# EAGLE board AllOfTheAbove7x_9nov (EAGLE 7.7.0)

Size 180.66 x 105.08 mm. Coordinates in mm from the lower left corner, seen from the top.
Copper layers (1*16): Top 0.035mm / dielectric 1.5mm / Bottom 0.035mm
Design rules "default": minimum track width 6mil, minimum drill 0.35mm, track to track 6mil, track to pad 6mil, pad to pad 6mil, via to via 6mil, smd to smd 6mil, copper to edge 40mil, drill to drill 6mil, minimum pad ring 10mil, minimum via ring 8mil, stop-mask expansion 4mil, vias tented up to drill 0mil, thermal gap 10mil
Net classes: 1 power: width 0.381 mm

## Footprints (pad centres in the part's own frame; a part is rotated, then mirrored left to right if it is on the bottom)
FENIXINTERNALCONNECTIONPAD = smd 0.635 x 1.27 bottom: P$1 0,0
CASE-A_3216 = smd 1.27 x 1.27: + -1.27,0; - 1.27,0
C0603 = smd 0.889 x 0.889: 1 -0.762,0; 2 0.762,0
SOT-323 = smd 0.7 x 0.9: ANODE -0.65,-0.95; CATHODE 0,0.95; NC 0.65,-0.95
DO35-10 = drill 0.813 long: A 5.08,0; C -5.08,0
SO08 = smd 0.6 x 2.2: 1 -1.905,-2.6; 2 -0.635,-2.6; 3 0.635,-2.6; 4 1.905,-2.6; 5 1.905,2.6; 6 0.635,2.6; 7 -0.635,2.6; 8 -1.905,2.6
1X03 = drill 1.016 long: 1 -2.54,0; 2 0,0; 3 2.54,0
ALPS_POT_SQUAREHOLES = drill 1: P$1 -2.5,-7.5; P$2 0,-7.5; P$3 2.58,-7.5 | smd 2.5 x 2: P$4 -4.75,0; P$5 4.75,0 | smd 2.5 x 2 bottom: P$6 -4.75,0; P$7 4.75,0
R0603 = smd 0.889 x 0.889: 1 -0.762,0; 2 0.762,0
153CLV-0505 = smd 3 x 1.6: + 2.2,0; - -2.2,0
SOT23 = smd 1 x 1.4: 1 -0.95,-1.1; 2 0.95,-1.1; 3 0,1.1
SOT23-BEC = smd 1 x 1.4: B -0.95,-1.1; C 0,1.1; E 0.95,-1.1
DO-214AC = smd 2.5 x 1.7: 1 -2,0; 2 2,0
TO92-EBC = drill 0.813 long: B 0,-1.27; C 2.54,-1.27; E -2.54,-1.27
TO252 = smd 1 x 1.6: 1 -2.28,-4.8; 2 2.28,-4.8 | smd 5.4 x 6.2: 3 0,2.5
TSSOP14 = smd 0.305 x 0.991: 1 -1.95,-2.918; 2 -1.3,-2.918; 3 -0.65,-2.918; 4 0,-2.918; 5 0.65,-2.918; 6 1.3,-2.918; 7 1.95,-2.918; 8 1.95,2.918; 9 1.3,2.918; 10 0.65,2.918; 11 0,2.918; 12 -0.65,2.918; 13 -1.3,2.918; 14 -1.95,2.918
SO16 = smd 0.6 x 2.2: 1 -4.445,-2.6; 2 -3.175,-2.6; 3 -1.905,-2.6; 4 -0.635,-2.6; 5 0.635,-2.6; 6 1.905,-2.6; 7 3.175,-2.6; 8 4.445,-2.6; 9 4.445,2.6; 10 3.175,2.6; 11 1.905,2.6; 12 0.635,2.6; 13 -0.635,2.6; 14 -1.905,2.6; 15 -3.175,2.6; 16 -4.445,2.6
3.5MM-JACK-SWITCH-13MM-NOHOLES = smd 1.95 x 3.85 bottom: RING_B@1 -3.7,0; SWITCH_B@1 3.7,0 | smd 1.95 x 3.85: RING_T@3 -3.7,0; SWITCH_T@3 3.7,0 | smd 3.85 x 1.95 bottom: SECOND_B@1 0,-3.5; TIP_B@1 0,4.5 | smd 3.85 x 1.95: SECOND_T@3 0,-3.5; TIP_T@3 0,4.5
POWER_16_SHROUDED = drill 1.016 pad 1.88 square: 1 -8.89,-1.27 | drill 1.016 pad 1.88: 2 -8.89,1.27; 3 -6.35,-1.27; 4 -6.35,1.27; 5 -3.81,-1.27; 6 -3.81,1.27; 7 -1.27,-1.27; 8 -1.27,1.27; 9 1.27,-1.27; 10 1.27,1.27; 11 3.81,-1.27; 12 3.81,1.27; 13 6.35,-1.27; 14 6.35,1.27; 15 8.89,-1.27; 16 8.89,1.27
POWERTESTPAD = drill 1 pad 2: P$1 0,0 | smd 2 x 1.5: P$2 0,-0.75 | smd 2 x 1.5 bottom: P$3 0,-0.75
BYPASSBOARD = drill 0.8 long: 12V 31.75,15.24; GND 34.29,5.08; GND2 138.43,15.24; GND3 140.97,5.08 | drill 0.8 square: P$1 31.75,5.08 | drill 0.8: P$2 31.75,10.16; P$3 31.75,7.62; P$4 31.75,12.7; P$5 34.29,15.24; P$6 34.29,10.16; P$7 34.29,12.7; P$8 34.29,7.62; P$9 104.14,5.08; P$10 104.14,10.16; P$11 104.14,7.62; P$12 104.14,12.7; P$13 138.43,5.08; P$14 138.43,10.16; P$15 138.43,7.62; P$16 138.43,12.7; P$17 140.97,15.24; P$18 140.97,10.16; P$19 140.97,12.7; P$20 140.97,7.62
GROUNDLOOP = drill 0.8 offset: P$1 1.27,0; P$2 -1.27,0
2X3-SHROUDED = drill 1.016 pad 1.88 octagon: 1 -1.27,2.54; 2 1.27,2.54; 3 -1.27,0; 4 1.27,0; 5 -1.27,-2.54; 6 1.27,-2.54
TC33X = smd 1.2 x 1.2: 1 -1,-1.825; 3 1,-1.825 | smd 1.5 x 1.6: 2 0,1.5
SOT23' = smd 0.6 x 0.7: P$1 -0.85,-1; P$2 0.85,-1; P$3 0,1
TESTPAD_DUAL_PTH = drill 0.8 square: P$1 -1.27,0 | drill 0.8: P$2 1.27,0

## Placement (x,y rotation side)
12V  POWER12V  [FENIXINTERNALCONNECTIONPAD]  -84.16,124 0 top  (outside the outline)
-12V  POWER-12V  [FENIXINTERNALCONNECTIONPAD]  -81.62,129.08 0 top  (outside the outline)
ACID1:C7  10uF  [CASE-A_3216]  31.41,92.89 180 top
ACID1:C22  1nF  [C0603]  26.33,85.27 0 top
ACID1:C23  10nF  [C0603]  26.33,87.17 0 top
ACID1:C24  100n  [C0603]  29.5,85.27 180 top
ACID1:C25  100n  [C0603]  37.76,91.61 90 top
ACID1:C26  47nF  [C0603]  26.33,90.98 0 top
ACID1:C27  1uF  [C0603]  38.39,87.17 180 top
ACID1:C28  1nF  [C0603]  21.88,89.08 90 top
ACID1:D1  BAS16W  [SOT-323]  16.17,89.08 0 top
ACID1:D2  BAS16W  [SOT-323]  19.34,89.08 180 top
ACID1:D3  1N4148DO35-10  [DO35-10]  7.91,92.25 0 top
ACID1:D4  1N4148DO35-10  [DO35-10]  7.91,88.44 180 top
ACID1:IC5  UA741D  [SO08]  32.68,89.08 270 top
ACID1:JP1  [1X03]  2.83,98.6 270 top
ACID1:JP4  [1X03]  45.38,89.71 270 top
ACID1:JP5  [1X03]  49.19,89.71 270 top
ACID1:JP6  [1X03]  41.57,89.71 270 top
ACID1:R22  10KB  [ALPS_POT_SQUAREHOLES]  37.76,37.64 0 top
ACID1:R23  1MC  [ALPS_POT_SQUAREHOLES]  40.3,57.96 0 top
ACID1:R24  10K  [ALPS_POT_SQUAREHOLES]  32.68,78.28 0 top
ACID1:R25  10K  [R0603]  26.33,89.08 0 top
ACID1:R26  4.7K  [R0603]  26.33,92.89 0 top
ACID1:R27  1M  [R0603]  32.68,85.27 0 top
ACID1:R28  5.6K  [R0603]  35.85,85.27 0 top
ACID1:R72  1M  [R0603]  38.39,89.08 0 top
C1  100n  [C0603]  67.6,17.95 90 top
C2  100n  [C0603]  70.14,10.34 270 top
C3  10u  [CASE-A_3216]  69.51,17.95 270 top
C4  10u  [CASE-A_3216]  72.05,10.97 90 top
C5  100n  [C0603]  82.84,34.47 180 top
C6  100n  [C0603]  66.33,126.54 180 top  (outside the outline)
C7  10u  [CASE-A_3216]  83.48,36.37 0 top
C8  10u  [CASE-A_3216]  65.7,124 0 top  (outside the outline)
C9  100n  [C0603]  235.88,110.03 0 top  (outside the outline)
C10  100n  [C0603]  235.88,107.49 0 top  (outside the outline)
C11  100n  [C0603]  230.8,4.62 0 top  (outside the outline)
C12  100n  [C0603]  230.8,0.81 0 top  (outside the outline)
C13  100n  [C0603]  37.12,165.28 0 top  (outside the outline)
C14  100n  [C0603]  37.12,162.74 0 top  (outside the outline)
C15  100n  [C0603]  42.2,165.28 0 top  (outside the outline)
C16  100n  [C0603]  42.2,162.74 0 top  (outside the outline)
C17  10uF  [153CLV-0505]  33.95,65.58 270 top
C18  10pF  [C0603]  33.31,43.99 90 top
C19  100n  [C0603]  -38.44,144.32 0 top  (outside the outline)
C20  100n  [C0603]  -33.36,144.32 0 top  (outside the outline)
C21  100n  [C0603]  -84.16,139.24 0 top  (outside the outline)
C22  10pF  [C0603]  11.72,134.79 0 top  (outside the outline)
C23  10pF  [C0603]  29.5,40.81 90 top
C24  47pF  [C0603]  27.6,43.99 270 top
C25  100n  [C0603]  -79.08,139.24 0 top  (outside the outline)
C26  100n  [C0603]  29.5,43.99 90 top
C27  100n  [C0603]  29.5,56.05 90 top
C28  10uF  [153CLV-0505]  27.6,65.58 270 top
C29  10uF  [153CLV-0505]  27.6,35.1 90 top
C30  100n  [C0603]  -74,139.24 0 top  (outside the outline)
C31  100n  [C0603]  -68.92,139.24 0 top  (outside the outline)
C32  33p  [C0603]  -63.84,139.24 0 top  (outside the outline)
C33  220p  [C0603]  -58.76,139.24 0 top  (outside the outline)
C34  33p  [C0603]  -53.68,139.24 0 top  (outside the outline)
C35  33p  [C0603]  -48.6,139.24 0 top  (outside the outline)
C36  33p  [C0603]  -43.52,139.24 0 top  (outside the outline)
C37  33p  [C0603]  -38.44,139.24 0 top  (outside the outline)
C38  100n  [C0603]  -33.36,139.24 0 top  (outside the outline)
C39  680n  [C0603]  -84.16,134.16 0 top  (outside the outline)
C40  33p FIX  [C0603]  -79.08,134.16 0 top  (outside the outline)
C41  33p FIX  [C0603]  -74,134.16 0 top  (outside the outline)
C44  10pF  [C0603]  6.64,175.44 0 top  (outside the outline)
CLIP1:C1  4.7uF  [153CLV-0505]  73.32,99.87 270 top
CLIP1:C2  2.2uF  [153CLV-0505]  54.27,87.17 270 top
CLIP1:C3  4.7uF  [153CLV-0505]  54.27,78.92 270 top
CLIP1:C4  100n  [C0603]  59.98,83.36 180 top
CLIP1:C7  10uF  [CASE-A_3216]  66.97,90.98 0 top
CLIP1:C25  100n  [C0603]  71.41,87.17 0 top
CLIP1:C28  1uF  [153CLV-0505]  76.49,89.71 270 top
CLIP1:C29  22nF  [C0603]  59.98,89.08 180 top
CLIP1:C30  1nF  [C0603]  59.98,85.27 0 top
CLIP1:C31  100pF  [C0603]  71.41,85.27 0 top
CLIP1:C35  3.3nF  [C0603]  110.15,147.5 90 top  (outside the outline)
CLIP1:C36  22nF  [C0603]  71.41,81.45 180 top
CLIP1:D1  BAS16W  [SOT-323]  63.16,83.36 0 top
CLIP1:D2  BAS16W  [SOT-323]  66.33,83.36 180 top
CLIP1:IC6  UA741D  [SO08]  65.7,87.17 270 top
CLIP1:JP1  [1X03]  41.57,78.28 270 top
CLIP1:JP2  [1X03]  45.38,78.28 270 top
CLIP1:JP3  [1X03]  49.19,78.28 270 top
CLIP1:Q1  SST201  [SOT23]  71.41,93.52 90 top
CLIP1:R29  100KA  [ALPS_POT_SQUAREHOLES]  63.16,75.74 0 top
CLIP1:R30  100KA  [ALPS_POT_SQUAREHOLES]  63.16,30.02 0 top
CLIP1:R31  100KA  [ALPS_POT_SQUAREHOLES]  65.7,52.88 0 top
CLIP1:R32  1M  [R0603]  62.52,91.61 90 top
CLIP1:R33  1K  [R0603]  59.98,87.17 180 top
CLIP1:R34  1M  [R0603]  59.98,90.98 0 top
CLIP1:R35  560R  [R0603]  71.41,89.08 180 top
CLIP1:R36  47R  [R0603]  71.41,90.98 0 top
CLIP1:R37  1K  [R0603]  71.41,83.36 0 top
CLIP1:R38  1.5K  [R0603]  68.87,82.72 270 top
CLIP1:R39  1M  [R0603]  68.24,80.19 0 top
CLIP1:R40  10K  [R0603]  67.6,92.89 0 top
CREAM1:C1  1uF  [153CLV-0505]  108.88,66.22 180 top
CREAM1:C2  1uF  [153CLV-0505]  99.99,74.47 180 top
CREAM1:C28  1uF  [153CLV-0505]  119.04,87.17 180 top
CREAM1:C44  470pF  [C0603]  111.42,78.28 180 top
CREAM1:C45  1uF  [C0603]  119.67,42.72 180 top
CREAM1:C46  100nF  [C0603]  108.88,88.44 270 top
CREAM1:C47  470pF  [C0603]  107.61,76.38 180 top
CREAM1:C49  100nF  [C0603]  106.34,78.28 180 top
CREAM1:C50  470pF  [C0603]  100.62,84.63 270 top
CREAM1:C52  4nF  [C0603]  94.91,84.63 90 top
CREAM1:C53  100nF  [C0603]  90.46,88.44 270 top
CREAM1:C54  100nF  [C0603]  122.21,65.58 180 top
CREAM1:C55  10nF  [C0603]  93,88.44 270 top
CREAM1:D1  BAS16W  [SOT-323]  110.15,71.3 0 top
CREAM1:D2  BAS16W  [SOT-323]  106.97,71.3 180 top
CREAM1:D3  BAS16W  [SOT-323]  97.45,79.55 180 top
CREAM1:D4  BAS16W  [SOT-323]  99.99,79.55 0 top
CREAM1:R47  39K  [R0603]  125.39,85.27 180 top
CREAM1:R48  47K  [R0603]  112.69,88.44 270 top
CREAM1:R49  470K  [R0603]  111.42,80.19 0 top
CREAM1:R50  100R  [R0603]  110.78,88.44 90 top
CREAM1:R51  10K  [R0603]  110.78,75.74 90 top
CREAM1:R52  1K  [R0603]  113.96,42.09 270 top
CREAM1:R53  10K  [R0603]  108.88,84.63 270 top
CREAM1:R54  100K  [R0603]  106.97,88.44 270 top
CREAM1:R55  150R  [R0603]  105.07,88.44 270 top
CREAM1:R56  470K  [R0603]  107.61,80.19 0 top
CREAM1:R57  10K  [R0603]  105.07,75.74 90 top
CREAM1:R58  10K  [R0603]  103.16,84.63 90 top
CREAM1:R59  100K  [R0603]  103.16,88.44 270 top
CREAM1:R60  150R  [R0603]  97.45,88.44 270 top
CREAM1:R61  470K  [R0603]  99.35,88.44 270 top
CREAM1:R62  10K  [R0603]  101.26,88.44 90 top
CREAM1:R63  39K  [R0603]  93,84.63 90 top
CREAM1:R64  22K  [R0603]  94.91,88.44 90 top
CREAM1:R65  100K  [R0603]  88.56,88.44 270 top
CREAM1:R66  430K  [R0603]  90.46,84.63 270 top
CREAM1:R67  15K  [R0603]  88.56,80.82 0 top
CREAM1:R68  3.3K  [R0603]  86.65,88.44 270 top
CREAM1:R69  100KB  [ALPS_POT_SQUAREHOLES]  119.04,75.74 0 top
CREAM1:R70  100KB  [ALPS_POT_SQUAREHOLES]  119.04,30.02 0 top
CREAM1:R71  100KB  [ALPS_POT_SQUAREHOLES]  116.5,52.88 0 top
CREAM1:T1  2n3904  [SOT23-BEC]  111.42,84 180 top
CREAM1:T2  2n3904  [SOT23-BEC]  106.34,84 180 top
CREAM1:T3  2n3904  [SOT23-BEC]  97.45,84 180 top
CREAM1:T4  2n3904  [SOT23-BEC]  87.29,84.63 180 top
D1  1n4001  [DO-214AC]  72.05,17.95 90 top
D2  1n4001  [DO-214AC]  68.24,9.7 270 top
D3  BAS16W  [SOT-323]  -79.08,162.1 0 top  (outside the outline)
D4  BAS16W  [SOT-323]  -76.54,162.1 0 top  (outside the outline)
D5  BAS16W  [SOT-323]  -74,162.1 0 top  (outside the outline)
D6  BAS16W  [SOT-323]  -71.46,162.1 0 top  (outside the outline)
D7  BAS16W  [SOT-323]  -68.92,162.1 0 top  (outside the outline)
D8  BAS16W  [SOT-323]  -66.38,162.1 0 top  (outside the outline)
D9  BAS16W  [SOT-323]  -63.84,162.1 0 top  (outside the outline)
D10  BAS16W  [SOT-323]  -61.3,162.1 0 top  (outside the outline)
D11  BAS16W  [SOT-323]  -58.76,162.1 0 top  (outside the outline)
D12  BAS16W  [SOT-323]  -56.22,162.1 0 top  (outside the outline)
D13  BAS16W  [SOT-323]  -53.68,162.1 0 top  (outside the outline)
D14  BAS16W  [SOT-323]  -51.14,162.1 0 top  (outside the outline)
D15  BAS16W  [SOT-323]  24.42,54.15 0 top
D17  BAS16W  [SOT-323]  16.8,150.03 0 top  (outside the outline)
D18  BAS16W  [SOT-323]  1.56,175.44 0 top  (outside the outline)
FUZZ1:C1  20uF  [153CLV-0505]  76.49,74.47 270 top
FUZZ1:C28  2.2uF  [153CLV-0505]  82.84,89.71 270 top
FUZZ1:C42  10nF  [C0603]  79.03,78.28 180 top
FUZZ1:Q1  MMBT3906LT1SMD  [SOT23-BEC]  75.22,83.36 90 top
FUZZ1:Q2  MMBT3906LT1SMD  [SOT23-BEC]  75.22,79.55 270 top
FUZZ1:R41  100K  [R0603]  79.03,85.9 180 top
FUZZ1:R42  500KA  [ALPS_POT_SQUAREHOLES]  91.1,65.58 0 top
FUZZ1:R43  1KB  [ALPS_POT_SQUAREHOLES]  91.1,40.18 0 top
FUZZ1:R44  8.2K  [R0603]  79.03,80.19 180 top
FUZZ1:R45  33K  [R0603]  79.03,84 180 top
FUZZ1:R46  470R  [R0603]  79.03,82.09 180 top
FUZZ1:T1  [TO92-EBC]  84.11,82.09 270 top
FUZZ1:T2  [TO92-EBC]  84.11,75.11 270 top
GND  POWERGND  [FENIXINTERNALCONNECTIONPAD]  -84.16,129.08 0 top  (outside the outline)
IC1  7809DT  [TO252]  84.11,25.57 180 top
IC2  TL074TSSOP14  [TSSOP14]  206.67,151.94 0 top  (outside the outline)
IC3  TL074TSSOP14  [TSSOP14]  29.5,50.34 0 top
IC4  TL074TSSOP14  [TSSOP14]  26.96,162.74 0 top  (outside the outline)
IC5  LM13700M  [SO16]  16.8,162.74 0 top  (outside the outline)
IC6  TL074TSSOP14  [TSSOP14]  233.34,36.37 0 top  (outside the outline)
IC8  TL074TSSOP14  [TSSOP14]  -35.9,195.12 0 top  (outside the outline)
IC9  TL074TSSOP14  [TSSOP14]  -81.62,179.88 0 top  (outside the outline)
IC10  LM13700M  [SO16]  -38.44,182.42 0 top  (outside the outline)
J1  JACK  [3.5MM-JACK-SWITCH-13MM-NOHOLES]  174.92,78.28 0 top
J2  POWERSHROUDED  [POWER_16_SHROUDED]  76.49,14.14 90 bottom
J3  JACK  [3.5MM-JACK-SWITCH-13MM-NOHOLES]  174.92,52.88 0 top
J4  JACK  [3.5MM-JACK-SWITCH-13MM-NOHOLES]  45.38,98.6 0 top
J5  JACK  [3.5MM-JACK-SWITCH-13MM-NOHOLES]  55.54,96.06 0 top
J6  JACK  [3.5MM-JACK-SWITCH-13MM-NOHOLES]  9.82,98.6 0 top
J7  JACK  [3.5MM-JACK-SWITCH-13MM-NOHOLES]  30.14,98.6 0 top
J8  JACK  [3.5MM-JACK-SWITCH-13MM-NOHOLES]  19.98,96.06 0 top
J9  JACK  [3.5MM-JACK-SWITCH-13MM-NOHOLES]  65.7,98.6 0 top
J10  JACK  [3.5MM-JACK-SWITCH-13MM-NOHOLES]  174.92,65.58 0 top
J11  JACK  [3.5MM-JACK-SWITCH-13MM-NOHOLES]  80.94,98.6 0 top
J12  JACK  [3.5MM-JACK-SWITCH-13MM-NOHOLES]  91.1,96.06 0 top
J13  JACK  [3.5MM-JACK-SWITCH-13MM-NOHOLES]  101.26,98.6 0 top
J14  JACK  [3.5MM-JACK-SWITCH-13MM-NOHOLES]  116.5,98.6 0 top
J15  JACK  [3.5MM-JACK-SWITCH-13MM-NOHOLES]  126.66,96.06 0 top
J16  JACK  [3.5MM-JACK-SWITCH-13MM-NOHOLES]  136.82,98.6 0 top
J17  JACK  [3.5MM-JACK-SWITCH-13MM-NOHOLES]  152.06,98.6 0 top
J18  JACK  [3.5MM-JACK-SWITCH-13MM-NOHOLES]  162.22,96.06 0 top
J19  JACK  [3.5MM-JACK-SWITCH-13MM-NOHOLES]  172.38,98.6 0 top
J20  JACK  [3.5MM-JACK-SWITCH-13MM-NOHOLES]  7.28,27.48 0 top
J21  JACK  [3.5MM-JACK-SWITCH-13MM-NOHOLES]  7.28,40.18 0 top
J22  JACK  [3.5MM-JACK-SWITCH-13MM-NOHOLES]  144.44,78.28 0 top
J23  JACK  [3.5MM-JACK-SWITCH-13MM-NOHOLES]  154.6,78.28 0 top
J24  JACK  [3.5MM-JACK-SWITCH-13MM-NOHOLES]  7.28,52.88 0 top
J25  JACK  [3.5MM-JACK-SWITCH-13MM-NOHOLES]  174.92,40.18 0 top
J26  JACK  [3.5MM-JACK-SWITCH-13MM-NOHOLES]  174.92,27.48 0 top
PCB1  EURORACK_PCB5STOMP  [EURORACK36HP_5STOMP]  -0.34,-3 0 top
Q1  MMBT3906LT1SMD  [SOT23-BEC]  21.88,150.03 0 top  (outside the outline)
Q3  MMBT3906LT1SMD  [SOT23-BEC]  21.88,183.06 0 top  (outside the outline)
Q4  MMBT3906LT1SMD  [SOT23-BEC]  79.03,130.99 0 top  (outside the outline)
R1  100k  [R0603]  235.88,104.95 0 top  (outside the outline)
R2  100k  [R0603]  235.88,102.41 0 top  (outside the outline)
R3  100k  [R0603]  235.88,99.87 0 top  (outside the outline)
R4  100k  [R0603]  235.88,97.33 0 top  (outside the outline)
R5  100k  [R0603]  243.5,93.52 0 top  (outside the outline)
R6  100k  [R0603]  235.88,83.36 0 top  (outside the outline)
R7  100k  [R0603]  240.96,83.36 0 top  (outside the outline)
R8  100k  [R0603]  235.88,79.55 0 top  (outside the outline)
R9  100k  [R0603]  230.8,65.58 0 top  (outside the outline)
R10  100k  [R0603]  235.88,65.58 0 top  (outside the outline)
R11  100k  [R0603]  230.8,61.77 0 top  (outside the outline)
R12  100k  [R0603]  235.88,61.77 0 top  (outside the outline)
R13  100k  [R0603]  230.8,47.8 0 top  (outside the outline)
R14  100k  [R0603]  235.88,47.8 0 top  (outside the outline)
R15  100k  [R0603]  230.8,43.99 0 top  (outside the outline)
R16  100k  [R0603]  235.88,43.99 0 top  (outside the outline)
R17  100k  [R0603]  230.8,30.02 0 top  (outside the outline)
R18  100k  [R0603]  235.88,30.02 0 top  (outside the outline)
R19  100k  [R0603]  230.8,26.21 0 top  (outside the outline)
R20  100k  [R0603]  235.88,26.21 0 top  (outside the outline)
R21  100k  [R0603]  230.8,12.24 0 top  (outside the outline)
R22  100k  [R0603]  235.88,12.24 0 top  (outside the outline)
R23  100k  [R0603]  230.8,8.43 0 top  (outside the outline)
R24  100k  [R0603]  235.88,8.43 0 top  (outside the outline)
R25  100k  [R0603]  72.68,39.55 0 top
R26  100k  [R0603]  69.51,39.55 0 top
R27  1M  [R0603]  26.33,60.5 0 top
R28  150K  [R0603]  -11.77,60.5 180 top  (outside the outline)
R29  10K  [R0603]  25.69,43.99 90 top
R30  470R  [R0603]  27.6,40.81 90 top
R31  1K  [R0603]  23.79,50.34 90 top
R32  100K  [R0603]  25.69,47.16 90 top
R33  100K  [R0603]  23.79,47.16 90 top
R34  100k  [R0603]  31.41,43.99 90 top
R35  4.7K  [R0603]  1.56,150.03 0 top  (outside the outline)
R36  10R  [R0603]  6.64,150.03 0 top  (outside the outline)
R37  10R  [R0603]  11.72,150.03 0 top  (outside the outline)
R38  100K  [R0603]  1.56,144.96 0 top  (outside the outline)
R39  100K  [R0603]  6.64,144.96 0 top  (outside the outline)
R40  100K  [R0603]  11.72,144.96 0 top  (outside the outline)
R41  1K  [R0603]  1.56,139.88 0 top  (outside the outline)
R42  10K  [R0603]  6.64,139.88 0 top  (outside the outline)
R43  100K  [R0603]  11.72,139.88 0 top  (outside the outline)
R44  100K  [R0603]  1.56,134.79 0 top  (outside the outline)
R45  330K  [R0603]  6.64,134.79 0 top  (outside the outline)
R46  330K  [R0603]  27.6,56.05 90 top
R47  1K  [R0603]  31.41,56.05 90 top
R48  100k  [R0603]  31.41,40.81 90 top
R49  100KB Lin  [ALPS_POT_SQUAREHOLES]  141.9,57.96 0 top
R50  10KB Lin  [ALPS_POT_SQUAREHOLES]  144.44,37.64 0 top
R51  14  [R0603]  -43.52,164.64 0 top  (outside the outline)
R52  470K  [R0603]  -38.44,164.64 0 top  (outside the outline)
R53  4K7  [R0603]  -33.36,164.64 0 top  (outside the outline)
R54  100  [R0603]  -84.16,159.56 0 top  (outside the outline)
R55  100  [R0603]  -79.08,159.56 0 top  (outside the outline)
R56  470K  [R0603]  -74,159.56 0 top  (outside the outline)
R57  22K  [R0603]  -68.92,159.56 0 top  (outside the outline)
R58  33K  [R0603]  -63.84,159.56 0 top  (outside the outline)
R59  4M7  [R0603]  -58.76,159.56 0 top  (outside the outline)
R60  10K  [R0603]  -53.68,159.56 0 top  (outside the outline)
R61  47K  [R0603]  -48.6,159.56 0 top  (outside the outline)
R62  33K  [R0603]  -43.52,159.56 0 top  (outside the outline)
R63  33K  [R0603]  -38.44,159.56 0 top  (outside the outline)
R64  100K  [R0603]  -33.36,159.56 0 top  (outside the outline)
R65  100K  [R0603]  -84.16,154.48 0 top  (outside the outline)
R66  100K  [R0603]  -79.08,154.48 0 top  (outside the outline)
R67  100K  [R0603]  -74,154.48 0 top  (outside the outline)
R68  100K  [R0603]  -68.92,154.48 0 top  (outside the outline)
R69  100K Linear  [ALPS_POT_SQUAREHOLES]  19.98,40.18 0 top
R70  100  [R0603]  -63.84,154.48 0 top  (outside the outline)
R71  100K  [R0603]  -58.76,154.48 0 top  (outside the outline)
R72  10K  [R0603]  -53.68,154.48 0 top  (outside the outline)
R73  220K  [R0603]  -48.6,154.48 0 top  (outside the outline)
R74  10K  [R0603]  -43.52,154.48 0 top  (outside the outline)
R75  6K8  [R0603]  -38.44,154.48 0 top  (outside the outline)
R76  100K  [R0603]  -33.36,154.48 0 top  (outside the outline)
R77  33K  [R0603]  -84.16,149.4 0 top  (outside the outline)
R78  100K  [R0603]  -79.08,149.4 0 top  (outside the outline)
R79  33K  [R0603]  -74,149.4 0 top  (outside the outline)
R80  100K  [R0603]  -68.92,149.4 0 top  (outside the outline)
R81  33K  [R0603]  -63.84,149.4 0 top  (outside the outline)
R82  33K  [R0603]  -58.76,149.4 0 top  (outside the outline)
R83  100K  [R0603]  -53.68,149.4 0 top  (outside the outline)
R84  100K  [R0603]  -48.6,149.4 0 top  (outside the outline)
R85  27k  [R0603]  -43.52,149.4 0 top  (outside the outline)
R86  150k  [R0603]  -38.44,149.4 0 top  (outside the outline)
R87  1k  [R0603]  -33.36,149.4 0 top  (outside the outline)
R88  1k  [R0603]  -84.16,144.32 0 top  (outside the outline)
R89  200k  [R0603]  -79.08,144.32 0 top  (outside the outline)
R90  200k  [R0603]  -74,144.32 0 top  (outside the outline)
R91  47k  [R0603]  -68.92,144.32 0 top  (outside the outline)
R98  4.7K  [R0603]  11.72,185.59 0 top  (outside the outline)
R99  10R  [R0603]  11.72,180.51 0 top  (outside the outline)
R100  10R  [R0603]  6.64,180.51 0 top  (outside the outline)
R101  100K  [R0603]  6.64,185.59 0 top  (outside the outline)
R102  100K  [R0603]  11.72,175.44 0 top  (outside the outline)
R103  100K  [R0603]  6.64,170.35 0 top  (outside the outline)
R104  1K  [R0603]  11.72,170.35 0 top  (outside the outline)
R105  10K  [R0603]  1.56,185.59 0 top  (outside the outline)
R106  100K  [R0603]  1.56,180.51 0 top  (outside the outline)
R107  100K  [R0603]  1.56,170.35 0 top  (outside the outline)
R108  330K  [R0603]  1.56,165.28 0 top  (outside the outline)
R109  [ALPS_POT_SQUAREHOLES]  162.22,65.58 0 top
R110  47k  [R0603]  96.81,133.53 0 top  (outside the outline)
R111  2.2k  [R0603]  -40.98,17.95 0 top  (outside the outline)
R112  18k  [R0603]  -35.9,17.95 0 top  (outside the outline)
R113  18k  [R0603]  -30.82,17.95 0 top  (outside the outline)
R114  10k  [ALPS_POT_SQUAREHOLES]  162.22,40.18 0 top
R115  14k  [R0603]  94.27,125.91 0 top  (outside the outline)
T1  3906  [SOT23-BEC]  -58.76,172.26 0 top  (outside the outline)
U$13  VOLTAGETESTPAD  [POWERTESTPAD]  75.22,37.01 0 top
U$15  VOLTAGETESTPAD  [POWERTESTPAD]  73.95,127.18 0 top  (outside the outline)
U$22  5STOMPBOARD  [BYPASSBOARD]  4.74,-3 0 top
U$23  HEADPHONEHOLE_BIGGAP  [HEADPHONEHOLE_GAP]  9.82,73.2 180 top
U$41  VOLTAGETESTPAD  [POWERTESTPAD]  77.76,37.01 0 top
U$42  VOLTAGETESTPAD  [POWERTESTPAD]  72.68,37.01 0 top
U$43  VOLTAGETESTPAD  [POWERTESTPAD]  67.6,37.01 0 top
U$44  VOLTAGETESTPAD  [POWERTESTPAD]  70.14,37.01 0 top
U$48  GNDLOOP  [GROUNDLOOP]  177.46,2.08 180 top
U$49  GNDLOOP  [GROUNDLOOP]  175.55,90.98 0 top
U$50  GNDLOOP  [GROUNDLOOP]  4.74,2.08 180 top
U$68  HEADPHONE  [2X3-SHROUDED]  17.44,51.61 180 bottom
U$70  100k  [TC33X]  24.42,142.41 0 top  (outside the outline)
U$71  100k  [TC33X]  32.04,142.41 0 top  (outside the outline)
U$74  BAT54S  [SOT23']  -48.6,162.1 0 top  (outside the outline)
U$92  TESTPOINT_DUAL_PTH  [TESTPAD_DUAL_PTH]  -84.16,162.1 0 top  (outside the outline)
U$93  50K  [TC33X]  -51.14,169.72 0 top  (outside the outline)
U$111  100k  [TC33X]  11.72,193.22 0 top  (outside the outline)
U$112  100k  [TC33X]  4.1,193.22 0 top  (outside the outline)
WSOUT  SIGNALOUT  [FENIXINTERNALCONNECTIONPAD]  -43.52,169.72 0 top  (outside the outline)

## Library data of the parts
12V -12V ACID1:D1 ACID1:D2 CLIP1:D1 CLIP1:D2 CREAM1:D1-CREAM1:D4 D3-D15 D17 D18 GND U$48-U$50 U$74 U$92 WSOUT = FenixBase
ACID1:C7 C3 C4 C7 C8 CLIP1:C7 IC2-IC4 IC6 IC8 IC9 J2 PCB1 U$22 U$23 = EurorackModularParts
ACID1:C22-ACID1:C28 ACID1:R25-ACID1:R28 ACID1:R72 C1 C2 C5 C6 C9-C16 C18-C27 C30-C41 C44 CLIP1:C4 CLIP1:C25 CLIP1:C29-CLIP1:C31 CLIP1:C35 CLIP1:C36 CLIP1:R32-CLIP1:R40 CREAM1:C44-CREAM1:C47 CREAM1:C49 CREAM1:C50 CREAM1:C52-CREAM1:C55 CREAM1:R47-CREAM1:R68 D1 D2 FUZZ1:C42 FUZZ1:R41 FUZZ1:R44-FUZZ1:R46 R1-R48 R51-R68 R70-R91 R98-R108 R110-R113 R115 = OPL
ACID1:D3 ACID1:D4 = diode
ACID1:IC5 CLIP1:IC6 = linear
ACID1:JP1 = pinhead@1
ACID1:JP4-ACID1:JP6 CLIP1:JP1-CLIP1:JP3 = pinhead
ACID1:R22 CLIP1:R30 CREAM1:R70 = EurorackModularParts; DESC: Tone
ACID1:R23 CLIP1:R31 CREAM1:R71 FUZZ1:R43 = EurorackModularParts; DESC: Distortion
ACID1:R24 CLIP1:R29 CREAM1:R69 FUZZ1:R42 = EurorackModularParts; DESC: Volume
C17 C28 C29 IC1 = adafruit@1
CLIP1:C1-CLIP1:C3 CLIP1:C28 CREAM1:C1 CREAM1:C2 CREAM1:C28 FUZZ1:C1 FUZZ1:C28 U$70 U$71 U$93 U$111 U$112 = adafruit
CLIP1:Q1 = transistor-fet
CREAM1:T1-CREAM1:T4 = transistor-neu-to92
FUZZ1:Q1 FUZZ1:Q2 Q1 Q3 Q4 = transistor-pnp
FUZZ1:T1 FUZZ1:T2 = transistor-neu-to92@1
IC5 IC10 = ota
J1 = EurorackModularParts; DESC: VCA2in
J3 = EurorackModularParts; DESC: Master Output
J4 = EurorackModularParts; DESC: Input B
J5 = EurorackModularParts; DESC: Difference B
J6 = EurorackModularParts; DESC: Input A
J7 = EurorackModularParts; DESC: Output A
J8 = EurorackModularParts; DESC: Difference A
J9 = EurorackModularParts; DESC: Output B
J10 = EurorackModularParts; DESC: Master Difference
J11 = EurorackModularParts; DESC: Input C
J12 = EurorackModularParts; DESC: Difference C
J13 = EurorackModularParts; DESC: Output C
J14 = EurorackModularParts; DESC: Input D
J15 = EurorackModularParts; DESC: Difference D
J16 = EurorackModularParts; DESC: Output D
J17 = EurorackModularParts; DESC: Input E
J18 = EurorackModularParts; DESC: Difference E
J19 = EurorackModularParts; DESC: Output E
J20 = EurorackModularParts; DESC: Master Input
J21 = EurorackModularParts; DESC: Drive CV
J22 R49 = EurorackModularParts; DESC: Mod
J23 = EurorackModularParts; DESC: Bias
J24 = EurorackModularParts; DESC: Envelope Out
J25 R114 = EurorackModularParts; DESC: Wet/Dry
J26 = EurorackModularParts; DESC: Cross Output
R50 = EurorackModularParts; DESC: Level
R69 = EurorackModularParts; DESC: Drive
R109 = EurorackModularParts; DESC: Post-gain
T1 = transistor
U$13 = FenixBase; DESC: 12V
U$15 = FenixBase; DESC: volt
U$41 = FenixBase; DESC: -12V
U$42 = FenixBase; DESC: 9V
U$43 = FenixBase; DESC: GND
U$44 = FenixBase; DESC: 4.5V
U$68 = SparkFun-Connectors

## Nets
4.5V: ACID1:R72.2 CLIP1:R34.2 R25.1 R26.2 U$44.P$1 U$44.P$2 U$44.P$3
9V: ACID1:JP4.1 C5.2 C7.+ CLIP1:JP2.1 CLIP1:Q1.1 CREAM1:R51.1 CREAM1:R57.1 CREAM1:R62.1 CREAM1:R66.2 CREAM1:R67.2 FUZZ1:C1.+ FUZZ1:Q1.E FUZZ1:R42.P$1 FUZZ1:R43.P$1 FUZZ1:T1.E IC1.2 R25.2 U$42.P$1 U$42.P$2 U$42.P$3
12V: 12V.P$1 ACID1:JP4.3 C1.2 C3.+ C6.2 C8.+ C9.2 C11.2 C13.2 C15.2 C19.2 C21.2 C26.2 C30.2 CLIP1:JP2.3 D1.2 IC1.1 IC2.4 IC3.4 IC4.4 IC5.11 IC6.4 IC8.4 IC9.4 IC10.11 J21.SWITCH_B@1 J21.SWITCH_T@3 R50.P$3 R115.1 U$13.P$1 U$13.P$2 U$13.P$3 U$22.12V U$70.3 U$71.3 U$93.1 U$111.3 U$112.3
-12V: -12V.P$1 ACID1:JP5.3 C2.1 C4.- C10.1 C12.1 C14.1 C16.1 C20.1 C25.1 C27.1 C31.1 CLIP1:JP3.3 D2.1 IC2.11 IC3.11 IC4.11 IC5.6 IC6.11 IC8.11 IC9.11 IC10.6 R56.2 R59.1 U$41.P$1 U$41.P$2 U$41.P$3 U$70.1 U$71.1 U$93.3 U$111.1 U$112.1
ACID1:N$2: ACID1:D3.C ACID1:D4.A ACID1:JP1.3
ACID1:N$3: ACID1:D1.CATHODE ACID1:D2.ANODE ACID1:JP1.1
ACID1:N$20: ACID1:C23.2 ACID1:R25.2
ACID1:N$21: ACID1:IC5.3 ACID1:JP6.2 ACID1:R25.1
ACID1:N$22: ACID1:C26.2 ACID1:IC5.2 ACID1:R27.1
ACID1:N$23: ACID1:C26.1 ACID1:R26.1
ACID1:N$32: ACID1:C27.1 ACID1:IC5.6 ACID1:R27.2
ACID1:N$33: ACID1:R23.P$3 ACID1:R26.2
ACID1:N$34: ACID1:C28.2 ACID1:JP1.2 ACID1:R22.P$3 ACID1:R24.P$3
ACID1:N$35: ACID1:C27.2 ACID1:R28.2
ACID1:N$36: ACID1:R22.P$1 ACID1:R22.P$2 ACID1:R28.1
ACID1:N$81: ACID1:C7.+ ACID1:C25.1 ACID1:IC5.7 ACID1:JP4.2
ACID1:N$82: ACID1:C24.1 ACID1:IC5.4 ACID1:JP5.2
ACID1:TO4.5V: ACID1:JP6.1 ACID1:R72.1
BIASINPUT: J23.TIP_B@1 J23.TIP_T@3 R61.2
BIASMAINLINE: C32.1 D4.ANODE D6.ANODE D8.ANODE D9.ANODE D10.ANODE IC8.8 R60.1
CLIP1:N$37: CLIP1:C29.2 CLIP1:JP1.2 CLIP1:R33.1
CLIP1:N$38: CLIP1:C30.2 CLIP1:IC6.3 CLIP1:R33.2
CLIP1:N$39: CLIP1:C7.+ CLIP1:C25.1 CLIP1:IC6.7 CLIP1:JP2.2
CLIP1:N$40: CLIP1:C4.1 CLIP1:IC6.4 CLIP1:JP3.2
CLIP1:N$41: CLIP1:JP1.1 CLIP1:R34.1
CLIP1:N$42: CLIP1:C31.1 CLIP1:IC6.2 CLIP1:R31.P$1 CLIP1:R31.P$2 CLIP1:R35.2 CLIP1:R36.2
CLIP1:N$43: CLIP1:C1.+ CLIP1:C31.2 CLIP1:IC6.6 CLIP1:R31.P$3
CLIP1:N$44: CLIP1:C1.- CLIP1:R37.1
CLIP1:N$45: CLIP1:D1.CATHODE CLIP1:D2.ANODE CLIP1:R30.P$1 CLIP1:R30.P$2 CLIP1:R37.2
CLIP1:N$46: CLIP1:R30.P$3 CLIP1:R38.1
CLIP1:N$47: CLIP1:C2.+ CLIP1:R36.1
CLIP1:N$48: CLIP1:C3.+ CLIP1:R35.1
CLIP1:N$49: CLIP1:C35.1 CLIP1:C36.1 CLIP1:R38.2
CLIP1:N$50: CLIP1:C36.2 CLIP1:Q1.3 CLIP1:R39.2
CLIP1:N$51: CLIP1:C28.+ CLIP1:Q1.2 CLIP1:R40.2
CLIP1:N$52: CLIP1:C28.- CLIP1:R29.P$3
CREAM1:N$1: CREAM1:C28.- CREAM1:R47.2
CREAM1:N$61: CREAM1:C28.+ CREAM1:C44.1 CREAM1:R48.2 CREAM1:R49.2 CREAM1:T1.B
CREAM1:N$62: CREAM1:R50.1 CREAM1:T1.E
CREAM1:N$63: CREAM1:C44.2 CREAM1:C45.1 CREAM1:R49.1 CREAM1:R51.2 CREAM1:T1.C
CREAM1:N$64: CREAM1:C45.2 CREAM1:R71.P$3
CREAM1:N$65: CREAM1:C1.- CREAM1:C47.1 CREAM1:R53.2 CREAM1:R54.2 CREAM1:R56.2 CREAM1:T2.B
CREAM1:N$66: CREAM1:C1.+ CREAM1:D1.ANODE CREAM1:D2.CATHODE
CREAM1:N$67: CREAM1:R55.2 CREAM1:T2.E
CREAM1:N$68: CREAM1:C47.2 CREAM1:C49.1 CREAM1:D1.CATHODE CREAM1:D2.ANODE CREAM1:R56.1 CREAM1:R57.2 CREAM1:T2.C
CREAM1:N$69: CREAM1:C49.2 CREAM1:R58.1
CREAM1:N$70: CREAM1:C2.- CREAM1:C50.1 CREAM1:R58.2 CREAM1:R59.2 CREAM1:R61.2 CREAM1:T3.B
CREAM1:N$71: CREAM1:R60.2 CREAM1:T3.E
CREAM1:N$72: CREAM1:C50.2 CREAM1:C52.1 CREAM1:D3.ANODE CREAM1:D4.CATHODE CREAM1:R61.1 CREAM1:R62.2 CREAM1:R63.1 CREAM1:T3.C
CREAM1:N$73: CREAM1:C53.1 CREAM1:R70.P$2
CREAM1:N$74: CREAM1:C55.2 CREAM1:R63.2 CREAM1:R70.P$1
CREAM1:N$75: CREAM1:C52.2 CREAM1:R64.1 CREAM1:R70.P$3
CREAM1:N$76: CREAM1:C2.+ CREAM1:D3.CATHODE CREAM1:D4.ANODE
CREAM1:N$77: CREAM1:C53.2 CREAM1:R65.2 CREAM1:R66.1 CREAM1:T4.B
CREAM1:N$78: CREAM1:C54.1 CREAM1:R67.1 CREAM1:T4.C
CREAM1:N$79: CREAM1:R68.2 CREAM1:T4.E
CREAM1:N$80: CREAM1:C54.2 CREAM1:R69.P$3
CREAM1:N$84: CREAM1:R52.1 CREAM1:R71.P$1
CREAM1:N$85: CREAM1:C46.2 CREAM1:R53.1
CREAM1:N$86: CREAM1:C46.1 CREAM1:R71.P$2
CROSSFADER_OUT: IC6.14 J26.TIP_B@1 J26.TIP_T@3 R110.1
CV_IN: J25.TIP_B@1 J25.TIP_T@3 R112.2
ENVELOPE_OUT: J1.SWITCH_B@1 J1.SWITCH_T@3 J24.TIP_B@1 J24.TIP_T@3 R47.1
EURORACK_IN: J20.TIP_B@1 J20.TIP_T@3 R34.1
FUZZ1:N$53: FUZZ1:Q2.E FUZZ1:R41.1 FUZZ1:R43.P$3 FUZZ1:T2.E
FUZZ1:N$54: FUZZ1:C28.- FUZZ1:Q1.B FUZZ1:R41.2 FUZZ1:T1.B
FUZZ1:N$55: FUZZ1:Q1.C FUZZ1:Q2.B FUZZ1:R45.2 FUZZ1:T1.C FUZZ1:T2.B
FUZZ1:N$56: FUZZ1:C1.- FUZZ1:R43.P$2
FUZZ1:N$57: FUZZ1:C42.2 FUZZ1:R42.P$3
FUZZ1:N$58: FUZZ1:C42.1 FUZZ1:R44.1 FUZZ1:R46.2
FUZZ1:N$59: FUZZ1:Q2.C FUZZ1:R44.2 FUZZ1:T2.C
GND: ACID1:C7.- ACID1:C22.2 ACID1:C24.2 ACID1:C25.2 ACID1:C28.1 ACID1:D1.ANODE ACID1:D2.CATHODE ACID1:D3.A ACID1:D4.C ACID1:JP5.1 ACID1:R23.P$1 ACID1:R23.P$2 ACID1:R24.P$1 C1.1 C2.2 C3.- C4.+ C5.1 C6.1 C7.- C8.- C9.1 C10.2 C11.1 C12.2 C13.1 C14.2 C15.1 C16.2 C17.- C19.1 C20.2 C21.1 C23.1 C25.2 C26.1 C27.2 C29.- C30.1 C31.2 CLIP1:C2.- CLIP1:C3.- CLIP1:C4.2 CLIP1:C7.- CLIP1:C25.2 CLIP1:C30.1 CLIP1:C35.2 CLIP1:D1.ANODE CLIP1:D2.CATHODE CLIP1:JP3.1 CLIP1:R29.P$1 CLIP1:R32.2 CLIP1:R39.1 CLIP1:R40.1 CREAM1:C55.1 CREAM1:R48.1 CREAM1:R50.2 CREAM1:R52.2 CREAM1:R54.1 CREAM1:R55.1 CREAM1:R59.1 CREAM1:R60.1 CREAM1:R64.2 CREAM1:R65.1 CREAM1:R68.1 CREAM1:R69.P$1 D3.CATHODE D5.CATHODE D7.CATHODE D11.CATHODE D12.CATHODE D13.ANODE D14.ANODE FUZZ1:R45.1 FUZZ1:R46.1 GND.P$1 IC1.3 IC4.5 IC4.10 IC5.7 IC5.10 IC6.10 IC6.12 IC8.5 IC8.10 IC10.7 IC10.10 J1.RING_B@1 J1.RING_T@3 J2.3 J2.4 J2.5 J2.6 J2.7 J2.8 J3.RING_B@1 J3.RING_T@3 J4.RING_B@1 J4.RING_T@3 J5.RING_B@1 J5.RING_T@3 J6.RING_B@1 J6.RING_T@3 J7.RING_B@1 J7.RING_T@3 J8.RING_B@1 J8.RING_T@3 J9.RING_B@1 J9.RING_T@3 J10.RING_B@1 J10.RING_T@3 J11.RING_B@1 J11.RING_T@3 J12.RING_B@1 J12.RING_T@3 J13.RING_B@1 J13.RING_T@3 J14.RING_B@1 J14.RING_T@3 J15.RING_B@1 J15.RING_T@3 J16.RING_B@1 J16.RING_T@3 J17.RING_B@1 J17.RING_T@3 J18.RING_B@1 J18.RING_T@3 J19.RING_B@1 J19.RING_T@3 J20.RING_B@1 J20.RING_T@3 J20.SWITCH_B@1 J20.SWITCH_T@3 J21.RING_B@1 J21.RING_T@3 J22.RING_B@1 J22.RING_T@3 J23.RING_B@1 J23.RING_T@3 J23.SWITCH_B@1 J23.SWITCH_T@3 J24.RING_B@1 J24.RING_T@3 J25.RING_B@1 J25.RING_T@3 J25.SWITCH_B@1 J25.SWITCH_T@3 J26.RING_B@1 J26.RING_T@3 R1.2 R5.2 R9.2 R13.2 R17.2 R21.2 R26.1 R27.1 R28.1 R36.1 R37.2 R39.2 R42.1 R46.1 R49.P$1 R50.P$1 R51.2 R52.2 R54.1 R55.1 R69.P$1 R72.2 R73.1 R74.1 R87.1 R88.1 R99.1 R100.2 R102.2 R105.1 R109.P$1 R114.P$1 U$22.GND U$22.GND2 U$22.GND3 U$43.P$1 U$43.P$2 U$43.P$3 U$48.P$1 U$48.P$2 U$49.P$1 U$49.P$2 U$50.P$1 U$50.P$2 U$68.3 U$68.4 U$92.P$2
GUITAR_IN: C28.- R27.2 U$68.5 U$68.6
GUITAR_OUT: R31.2 R32.2 U$15.P$1 U$15.P$2 U$15.P$3
INPUT_A: J6.TIP_B@1 J6.TIP_T@3 R2.2 U$22.P$3
INPUT_B: J4.TIP_B@1 J4.TIP_T@3 R6.2 U$22.P$7
INPUT_C: J11.TIP_B@1 J11.TIP_T@3 R10.2 U$22.P$11
INPUT_D: J14.TIP_B@1 J14.TIP_T@3 R14.2 U$22.P$15
INPUT_E: J17.TIP_B@1 J17.TIP_T@3 R22.2 U$22.P$19
INPUT_WS: R85.2 U$22.P$20
MIX_OUT: D15.ANODE IC3.8 IC3.9 R35.1
N$2: D1.1 J2.9 J2.10
N$3: D2.2 J2.1 J2.2
N$4: ACID1:C22.1 ACID1:C23.1 U$22.P$4
N$5: ACID1:R24.P$2 U$22.P$2
N$7: CLIP1:C29.1 CLIP1:R32.1 U$22.P$8
N$8: FUZZ1:C28.+ U$22.P$12
N$9: FUZZ1:R42.P$2 U$22.P$10
N$10: CREAM1:R47.1 U$22.P$16
N$11: CREAM1:R69.P$2 U$22.P$14
N$12: CLIP1:R29.P$2 U$22.P$6
N$14: C23.2 C28.+ IC3.3 R28.2
N$15: IC2.3 R1.1 R2.1
N$16: IC6.9 R111.2 R112.1 R113.1
N$17: C24.1 IC3.1 R29.2 R31.1
N$18: IC2.1 J8.TIP_B@1 J8.TIP_T@3 R4.1
N$19: IC2.5 R5.1 R6.1
N$20: IC2.6 R7.1 R8.2
N$21: Q4.E R111.1
N$22: IC6.8 Q4.B
N$23: IC2.7 J5.TIP_B@1 J5.TIP_T@3 R8.1
N$24: IC2.10 R9.1 R10.1
N$25: IC2.9 R11.1 R12.2
N$26: R114.P$3 R115.2
N$27: R113.2 R114.P$2
N$28: IC2.8 J12.TIP_B@1 J12.TIP_T@3 R12.1
N$29: IC2.12 R13.1 R14.1
N$30: IC2.13 R15.1 R16.2
N$33: IC2.14 J15.TIP_B@1 J15.TIP_T@3 R16.1
N$34: IC6.5 R17.1 R18.1
N$35: IC6.6 R19.1 R20.2
N$38: IC6.7 J10.TIP_B@1 J10.TIP_T@3 R20.1
N$39: IC6.3 R21.1 R22.1
N$40: IC6.2 R23.1 R24.2
N$43: IC6.1 J18.TIP_B@1 J18.TIP_T@3 R24.1
N$44: C24.2 IC3.2 R29.1 R30.2
N$45: C29.+ R30.1
N$46: C18.2 IC3.7 R33.2 R48.2
N$47: IC3.5 R34.2
N$48: IC5.4 R37.1 R38.1
N$49: IC5.3 R35.2 R36.2
N$50: IC4.3 IC5.5 R39.1
N$51: C22.1 IC4.2 R40.1
N$52: C22.2 IC4.1 R40.2 R41.1
N$53: R38.2 U$71.2
N$54: D17.ANODE IC4.7 Q1.B
N$55: D17.CATHODE IC4.6 R43.1 R44.2 R45.2
N$56: Q1.E R42.2 R43.2
N$57: IC5.1 Q1.C
N$58: R45.1 U$70.2
N$59: R44.1 R69.P$2
N$60: IC3.13 IC3.14 R47.2
N$61: C17.+ D15.CATHODE IC3.12 R46.2
N$62: C18.1 IC3.6 R48.1
N$63: R51.1 U$74.P$3
N$64: C32.2 IC8.9 R60.2 R61.1
N$65: R49.P$2 R57.2
N$66: J22.TIP_B@1 J22.TIP_T@3 R49.P$3
N$67: D14.CATHODE R57.1 R58.1 R59.2 T1.E
N$68: R50.P$2 R58.2
N$69: C38.2 R74.2 R75.2 U$74.P$1 U$74.P$2
N$70: C33.1 IC8.7 R62.1 R63.2 R64.2
N$71: C33.2 C39.2 IC8.6 R62.2
N$72: C39.1 IC10.5 R52.1
N$73: D5.ANODE D6.CATHODE IC9.3 R63.1
N$74: C34.1 IC9.1 R65.1 R79.2 R80.2
N$75: D7.ANODE D8.CATHODE IC9.5 R79.1
N$76: C34.2 IC9.2 R64.1 R65.2
N$77: C35.2 IC9.6 R66.2 R80.1
N$78: C35.1 IC9.7 R66.1 R67.2 R81.2
N$79: D9.CATHODE D12.ANODE IC9.10 R81.1
N$80: C36.1 IC9.8 R82.2 R83.2 R84.1
N$81: C36.2 IC9.9 R67.1 R84.2
N$82: D10.CATHODE D11.ANODE IC9.12 R82.1
N$83: C40.2 IC9.13 R68.2 R83.1
N$84: C40.1 IC9.14 R68.1 R77.1 R78.1
N$85: D3.ANODE D4.CATHODE IC8.3 R77.2
N$86: C41.2 IC8.2 R76.1 R78.2
N$87: C41.1 IC8.1 R75.1 R76.2 U$92.P$1
N$88: C38.1 IC8.12 R73.2
N$89: C37.1 IC8.14 R70.2
N$90: C37.2 IC8.13 R71.2 R72.1
N$91: D13.CATHODE R56.1 T1.B
N$92: R53.1 T1.C
N$93: IC10.1 R53.2
N$94: IC10.3 R54.2 R85.1
N$95: R86.2 U$93.2
N$96: IC10.4 R55.2 R86.1
N$97: IC10.13 R87.2 R89.1
N$98: IC10.14 R88.2 R90.1
N$106: IC5.13 R100.1 R101.1
N$107: IC5.14 R98.2 R99.2
N$108: IC4.12 IC5.12 R102.1
N$109: C44.1 IC4.13 R103.1
N$110: C44.2 IC4.14 R103.2 R104.1
N$111: R101.2 U$111.2
N$112: D18.ANODE IC4.8 Q3.B
N$113: D18.CATHODE IC4.9 R106.1 R107.2 R108.2
N$114: Q3.E R105.2 R106.2
N$115: IC5.16 Q3.C
N$116: R108.1 U$112.2
N$117: R107.1 R109.P$2
N$118: IC2.2 R3.1 R4.2
OTA_CONTROL: IC10.16 Q4.C
OTA_OUT: IC6.13 IC10.12 R91.2 R110.2
OUTPUT_A: J4.SWITCH_B@1 J4.SWITCH_T@3 J7.TIP_B@1 J7.TIP_T@3 R3.2 U$22.P$1
OUTPUT_B: J9.TIP_B@1 J9.TIP_T@3 J11.SWITCH_B@1 J11.SWITCH_T@3 R7.2 U$22.P$5
OUTPUT_C: J13.TIP_B@1 J13.TIP_T@3 J14.SWITCH_B@1 J14.SWITCH_T@3 R11.2 U$22.P$9
OUTPUT_D: J16.TIP_B@1 J16.TIP_T@3 J17.SWITCH_B@1 J17.SWITCH_T@3 R15.2 U$22.P$13
OUTPUT_E: J19.TIP_B@1 J19.TIP_T@3 R23.2 R98.1 U$22.P$17
OUTPUT_WS: R70.1 R71.1 U$22.P$18 WSOUT.P$1
VCA_CV_IN1: J21.TIP_B@1 J21.TIP_T@3 R69.P$3
VCA_CV_IN2: J1.TIP_B@1 J1.TIP_T@3 R109.P$3
VCA_OUTPUT1: J6.SWITCH_B@1 J6.SWITCH_T@3 R18.2 R41.2 R90.2
VCA_OUTPUT2: J3.TIP_B@1 J3.TIP_T@3 R19.2 R89.2 R91.1 R104.2
VCA_SIG_IN: IC3.10 R32.1 R33.1

## Tracks (layer width: path | path; a pad name or v marks a point on that pad's centre or on a via)
4.5V  (4 unrouted)
9V  (17 unrouted)
12V  (34 unrouted)
-12V  (29 unrouted)
ACID1:N$2  (2 unrouted)
ACID1:N$3  (2 unrouted)
ACID1:N$20  (1 unrouted)
ACID1:N$21  (2 unrouted)
ACID1:N$22  (2 unrouted)
ACID1:N$23  (1 unrouted)
ACID1:N$32  (2 unrouted)
ACID1:N$33  (1 unrouted)
ACID1:N$34  (3 unrouted)
ACID1:N$35  (1 unrouted)
ACID1:N$36  (2 unrouted)
ACID1:N$81  (3 unrouted)
ACID1:N$82  (2 unrouted)
ACID1:TO4.5V  (1 unrouted)
BIASINPUT  (1 unrouted)
BIASMAINLINE  (7 unrouted)
CLIP1:N$37  (2 unrouted)
CLIP1:N$38  (2 unrouted)
CLIP1:N$39  (3 unrouted)
CLIP1:N$40  (2 unrouted)
CLIP1:N$41  (1 unrouted)
CLIP1:N$42  (5 unrouted)
CLIP1:N$43  (3 unrouted)
CLIP1:N$44  (1 unrouted)
CLIP1:N$45  (4 unrouted)
CLIP1:N$46  (1 unrouted)
CLIP1:N$47  (1 unrouted)
CLIP1:N$48  (1 unrouted)
CLIP1:N$49  (2 unrouted)
CLIP1:N$50  (2 unrouted)
CLIP1:N$51  (2 unrouted)
CLIP1:N$52  (1 unrouted)
CREAM1:N$1  (1 unrouted)
CREAM1:N$61  (4 unrouted)
CREAM1:N$62  (1 unrouted)
CREAM1:N$63  (4 unrouted)
CREAM1:N$64  (1 unrouted)
CREAM1:N$65  (5 unrouted)
CREAM1:N$66  (2 unrouted)
CREAM1:N$67  (1 unrouted)
CREAM1:N$68  (6 unrouted)
CREAM1:N$69  (1 unrouted)
CREAM1:N$70  (5 unrouted)
CREAM1:N$71  (1 unrouted)
CREAM1:N$72  (7 unrouted)
CREAM1:N$73  (1 unrouted)
CREAM1:N$74  (2 unrouted)
CREAM1:N$75  (2 unrouted)
CREAM1:N$76  (2 unrouted)
CREAM1:N$77  (3 unrouted)
CREAM1:N$78  (2 unrouted)
CREAM1:N$79  (1 unrouted)
CREAM1:N$80  (1 unrouted)
CREAM1:N$84  (1 unrouted)
CREAM1:N$85  (1 unrouted)
CREAM1:N$86  (1 unrouted)
CROSSFADER_OUT  (2 unrouted)
CV_IN  (1 unrouted)
ENVELOPE_OUT  (2 unrouted)
EURORACK_IN  (1 unrouted)
FUZZ1:N$53  (3 unrouted)
FUZZ1:N$54  (3 unrouted)
FUZZ1:N$55  (4 unrouted)
FUZZ1:N$56  (1 unrouted)
FUZZ1:N$57  (1 unrouted)
FUZZ1:N$58  (2 unrouted)
FUZZ1:N$59  (2 unrouted)
GND  (165 unrouted)
GUITAR_IN  (3 unrouted)
GUITAR_OUT  (2 unrouted)
INPUT_A  (2 unrouted)
INPUT_B  (2 unrouted)
INPUT_C  (2 unrouted)
INPUT_D  (2 unrouted)
INPUT_E  (2 unrouted)
INPUT_WS  (1 unrouted)
MIX_OUT  (3 unrouted)
N$2  (2 unrouted)
N$3  (2 unrouted)
N$4  (2 unrouted)
N$5  (1 unrouted)
N$7  (2 unrouted)
N$8  (1 unrouted)
N$9  (1 unrouted)
N$10  (1 unrouted)
N$11  (1 unrouted)
N$12  (1 unrouted)
N$14  (3 unrouted)
N$15  (2 unrouted)
N$16  (3 unrouted)
N$17  (3 unrouted)
N$18  (2 unrouted)
N$19  (2 unrouted)
N$20  (2 unrouted)
N$21  (1 unrouted)
N$22  (1 unrouted)
N$23  (2 unrouted)
N$24  (2 unrouted)
N$25  (2 unrouted)
N$26  (1 unrouted)
N$27  (1 unrouted)
N$28  (2 unrouted)
N$29  (2 unrouted)
N$30  (2 unrouted)
N$33  (2 unrouted)
N$34  (2 unrouted)
N$35  (2 unrouted)
N$38  (2 unrouted)
N$39  (2 unrouted)
N$40  (2 unrouted)
N$43  (2 unrouted)
N$44  (3 unrouted)
N$45  (1 unrouted)
N$46  (3 unrouted)
N$47  (1 unrouted)
N$48  (2 unrouted)
N$49  (2 unrouted)
N$50  (2 unrouted)
N$51  (2 unrouted)
N$52  (3 unrouted)
N$53  (1 unrouted)
N$54  (2 unrouted)
N$55  (4 unrouted)
N$56  (2 unrouted)
N$57  (1 unrouted)
N$58  (1 unrouted)
N$59  (1 unrouted)
N$60  (2 unrouted)
N$61  (3 unrouted)
N$62  (2 unrouted)
N$63  (1 unrouted)
N$64  (3 unrouted)
N$65  (1 unrouted)
N$66  (1 unrouted)
N$67  (4 unrouted)
N$68  (1 unrouted)
N$69  (4 unrouted)
N$70  (4 unrouted)
N$71  (3 unrouted)
N$72  (2 unrouted)
N$73  (3 unrouted)
N$74  (4 unrouted)
N$75  (3 unrouted)
N$76  (3 unrouted)
N$77  (3 unrouted)
N$78  (4 unrouted)
N$79  (3 unrouted)
N$80  (4 unrouted)
N$81  (3 unrouted)
N$82  (3 unrouted)
N$83  (3 unrouted)
N$84  (4 unrouted)
N$85  (3 unrouted)
N$86  (3 unrouted)
N$87  (4 unrouted)
N$88  (2 unrouted)
N$89  (2 unrouted)
N$90  (3 unrouted)
N$91  (2 unrouted)
N$92  (1 unrouted)
N$93  (1 unrouted)
N$94  (2 unrouted)
N$95  (1 unrouted)
N$96  (2 unrouted)
N$97  (2 unrouted)
N$98  (2 unrouted)
N$106  (2 unrouted)
N$107  (2 unrouted)
N$108  (2 unrouted)
N$109  (2 unrouted)
N$110  (3 unrouted)
N$111  (1 unrouted)
N$112  (2 unrouted)
N$113  (4 unrouted)
N$114  (2 unrouted)
N$115  (1 unrouted)
N$116  (1 unrouted)
N$117  (1 unrouted)
N$118  (2 unrouted)
OTA_CONTROL  (1 unrouted)
OTA_OUT  (3 unrouted)
OUTPUT_A  (3 unrouted)
OUTPUT_B  (3 unrouted)
OUTPUT_C  (3 unrouted)
OUTPUT_D  (3 unrouted)
OUTPUT_E  (3 unrouted)
OUTPUT_WS  (3 unrouted)
VCA_CV_IN1  (1 unrouted)
VCA_CV_IN2  (1 unrouted)
VCA_OUTPUT1  (3 unrouted)
VCA_OUTPUT2  (4 unrouted)
VCA_SIG_IN  (2 unrouted)

## Text on the board
tValues: <9v 12v>